# Allegro board 野火_STM32F103C8T6_核心板_V1.0_底板PCB参考设计_Allegro格式.brd
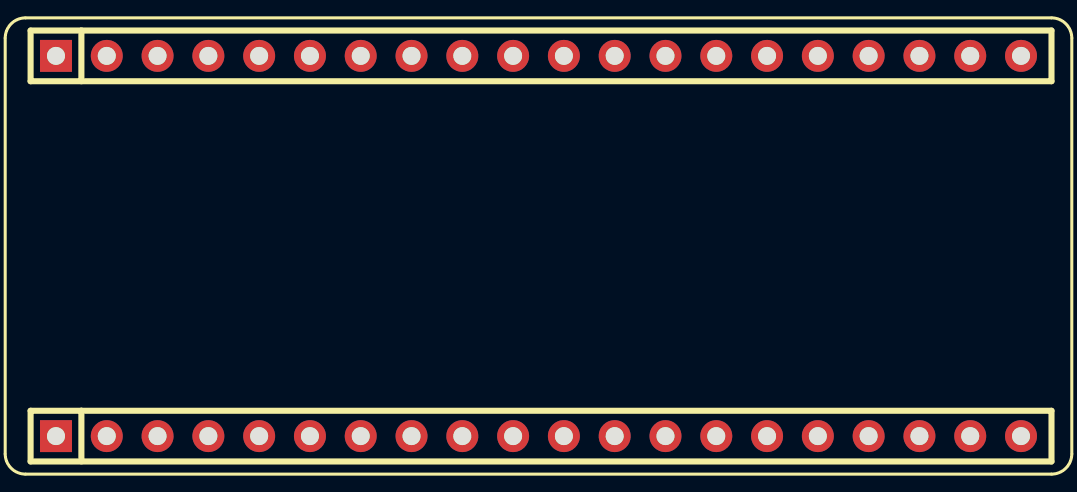
[diagram p0: board, top side]
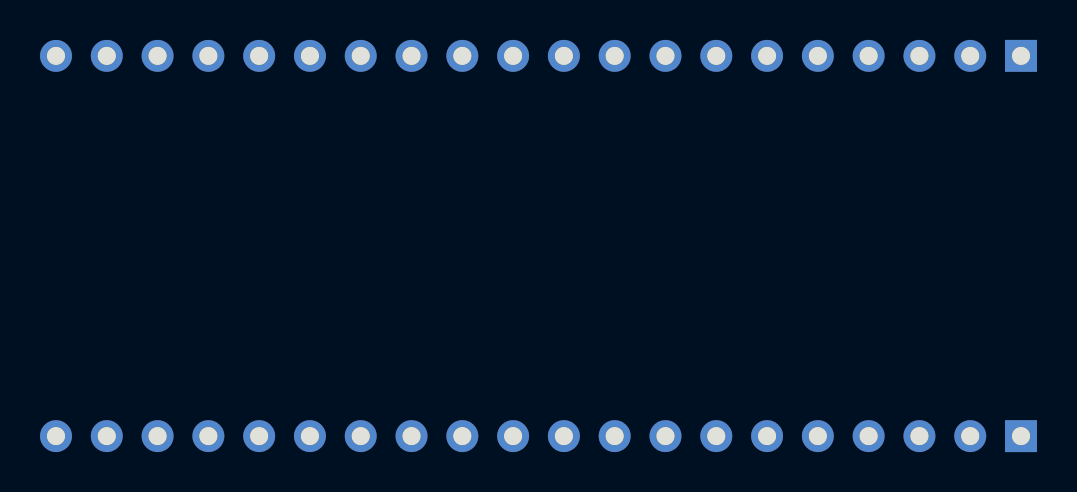
[diagram p1: board, bottom side, seen from below]

No outline. copper layers: TOP, BOTTOM. Coordinates in mm from the lowest, leftmost part position.

## Design rules (mm)
net group PWR: nets 3V3 5V GND

## Placement (name value [footprint] x y rotation side)
J5  -  [SIP20-2P54-F]  0 19.05 0 bottom
J6  -  [SIP20-2P54-F]  0 0 0 bottom

## Library data of the parts
J5 J6 = CONN_HDR_1

## Footprints (pads in the part's own frame, mm; a bottom-side part is the same pattern mirrored in y, then rotated)
SIP20-2P54-F
  rect 1.6x1.6 hole 0.9: 1(-26.67,-1.27)
  round 1.6 hole 0.9: 2(-24.13,-1.27) 3(-21.59,-1.27) 4(-19.05,-1.27) 5(-16.51,-1.27) 6(-13.97,-1.27) 7(-11.43,-1.27) 8(-8.89,-1.27) 9(-6.35,-1.27) 10(-3.81,-1.27) 11(-1.27,-1.27) 12(1.27,-1.27) 13(3.81,-1.27) 14(6.35,-1.27) 15(8.89,-1.27) 16(11.43,-1.27) 17(13.97,-1.27) 18(16.51,-1.27) 19(19.05,-1.27) 20(21.59,-1.27)

## Nets
3V3: J5.15 J5.17 J5.19 J6.1 J6.3 J6.20
5V: J5.1
GND: J5.9 J5.18 J5.20 J6.2 J6.19
PA0/WKUP: J5.14
PA1: J5.13
PA2: J5.12
PA3: J5.11
PA4: J5.10
PA5: J5.8
PA6: J5.7
PA7: J5.6
PA8: J6.8
PA9: J6.9
PA10: J6.10
PA15: J6.11
PB0: J5.5
PB1: J5.4
PB3: J6.12
PB4: J6.13
PB5: J6.14
PB6: J6.15
PB7: J6.16
PB8: J6.17
PB9: J6.18
PB10: J5.3
PB11: J5.2
PB12: J6.4
PB13: J6.5
PB14: J6.6
PB15: J6.7
PC13: J5.16

## Text on the board
DIMENSION: UNIT:MM
